# Altium PCB MEGA Shield.PcbDoc
Units mil, origin at the board's own origin, x right, y up, seen from the top; angles counter-clockwise.
Board outline 3365 x 2050 mil, 2 copper layers (Top Layer, Bottom Layer); 20 components, 44 nets, 167 pads, 3 vias.
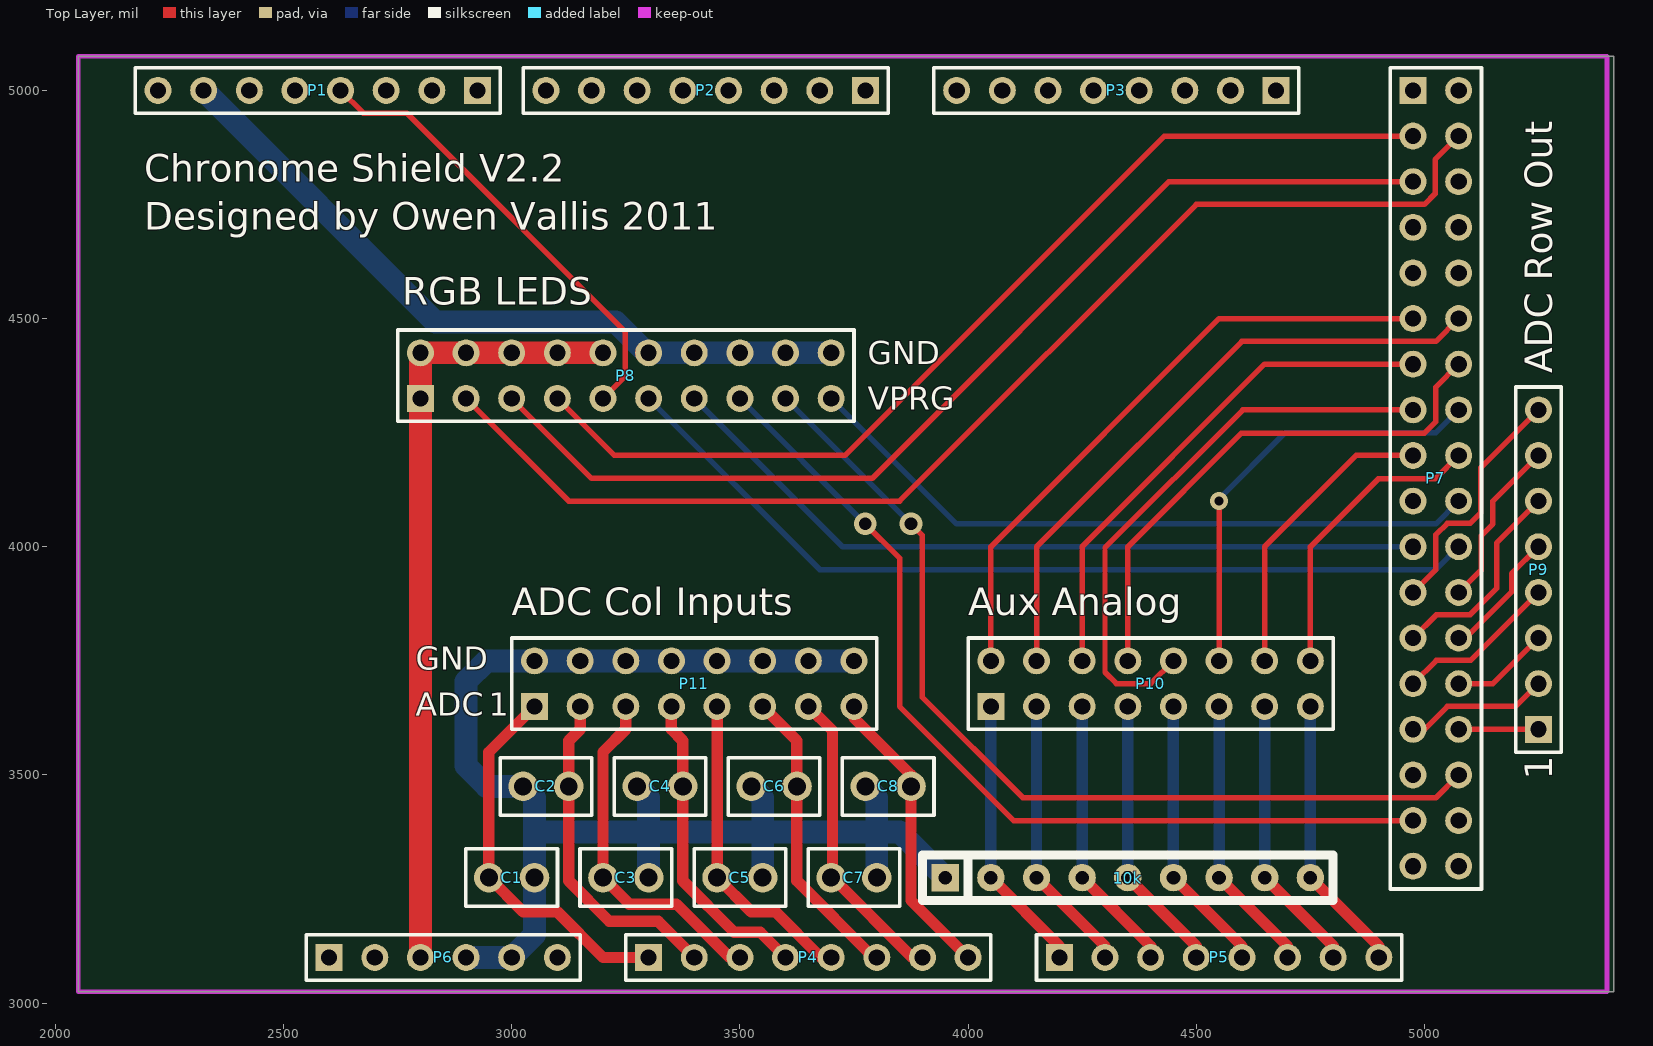
[diagram p0: Top Layer view]
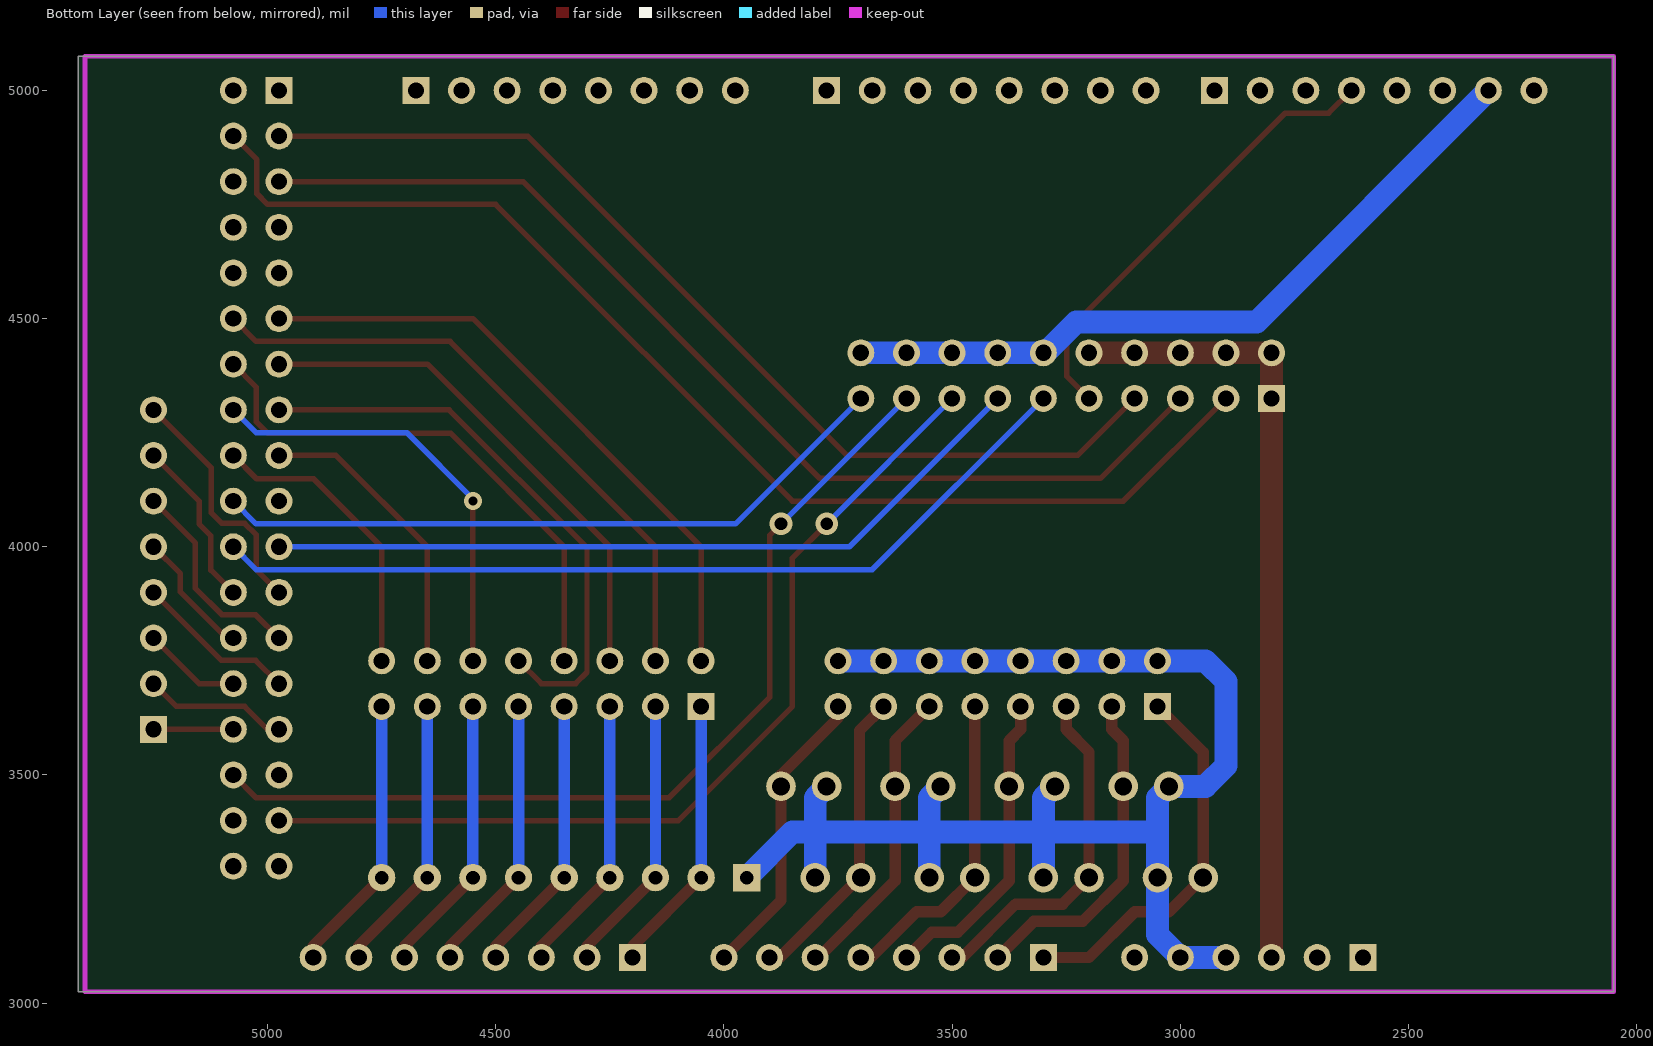
[diagram p1: Bottom Layer view, seen from below]

## Layer stack, top to bottom
Top Layer: signal copper 1.4
Dielectric: dielectric 12.6, FR-4, Dk 4.8
Bottom Layer: signal copper 1.4

## Board outline
2050,3025 2050,5075 5415,5075 5415,3025

## Design rules (kind name [scope] priority, off if disabled: settings)
Clearance [All] p1: gap=13
PolygonConnect [All] p1: connectstyle=Relief reliefconductorwidth=10 reliefentries=4 polygonreliefangle="90 Angle"
RoutingVias [All] p1: holewidth=20 width=40 viastyle="Through Hole" minholewidth=20 minwidth=40 maxholewidth=20 maxwidth=40
SilkscreenOverComponentPads [All] p1: minsilkscreentomaskgap=10
SolderMaskExpansion [All] p1: expansion=4
Width [All] p1: maxlimit=50 minlimit=12 preferedwidth=12 minimp=50.000000 maximp=50.000000 favimp=50.000000
27 further rules are at their usual default settings.

## Components (designator, comment, footprint, x,y, rotation, side; value= is the part's Value field where it differs from the comment)
10k "Res1" "9-Pin Resistor Network" 3950,3275 r90 top
C1 "Cap" CAPR2.54-5.1x3.2 3000,3275 r180 top
C2 "Cap" CAPR2.54-5.1x3.2 3075,3475 r0 top
C3 "Cap" CAPR2.54-5.1x3.2 3250,3275 r180 top
C4 "Cap" CAPR2.54-5.1x3.2 3325,3475 r0 top
C5 "Cap" CAPR2.54-5.1x3.2 3500,3275 r180 top
C6 "Cap" CAPR2.54-5.1x3.2 3575,3475 r0 top
C7 "Cap" CAPR2.54-5.1x3.2 3750,3275 r180 top
C8 "Cap" CAPR2.54-5.1x3.2 3825,3475 r0 top
P1 "PWM 8-13" HDR1X8 2925,5000 r180 top
P2 "PWM 2-7" HDR1X8 3775,5000 r180 top
P3 "COM" HDR1X8 4675,5000 r180 top
P4 "Analog In 0-7" HDR1X8 3300,3100 r0 top
P5 "Analog In 8-15" HDR1X8 4200,3100 r0 top
P6 "Power" HDR1X6 2600,3100 r0 top
P7 "Digital 22-53" HDR2X18 4975,5000 r270 top
P8 "OUT     IN" HDR2X10_CEN 2800,4325 r0 top
P9 "ADC Row Outputs" HDR1X8 5250,3600 r90 top
P10 "Extra ADC" HDR2X8_CEN 4050,3650 r0 top
P11 "ADC Col Inputs" HDR2X8_CEN 3050,3650 r0 top

## Footprints (in the part's own frame and the unit in brackets; to place one, negate y for a bottom-side part, rotate by r counter-clockwise, add the part's x,y. Pads: shape width x height; smd on the part's side, far side on the other; paste and mask are expansions set on the pad)
"9-Pin Resistor Network" [mil] "9-Pin Resistor Network"
  rect 60x60 hole 30: 0(0,0)
  round 60 hole 30: 1(0,-100) 2(0,-200) 3(0,-300) 4(0,-400) 5(0,-500) 6(0,-600) 7(0,-700) 8(0,-800)
  silkscreen extent -50,-850 50,50
CAPR2.54-5.1x3.2 [mm] "Capacitor, Ceramic, Thru-Hole, Dipped Radial; Body 5.1 x 3.2 mm (WxT) Pin Spacing 2.54 mm (typ)"
  round 1.65 hole 1: 1(-1.27,0) 2(1.27,0)
  silkscreen extent -2.55,-1.6 2.55,1.6
HDR1X6 [mm] "Connector; Header; 6 Position"
  rect 1.5x1.5 hole 0.9: 1(0,0)
  round 1.5 hole 0.9: 2(2.54,0) 3(5.08,0) 4(7.62,0) 5(10.16,0) 6(12.7,0)
  silkscreen extent -1.27,-1.27 13.97,1.27
HDR1X8 [mm] "Connector; Header; 8 Position"
  rect 1.5x1.5 hole 0.9: 1(0,0)
  round 1.5 hole 0.9: 2(2.54,0) 3(5.08,0) 4(7.62,0) 5(10.16,0) 6(12.7,0) 7(15.24,0) 8(17.78,0)
  silkscreen extent -1.27,-1.27 19.05,1.27
HDR2X8_CEN [mm] "Connector; Header; 8x2 Position"
  rect 1.5x1.5 hole 0.9: 1(0,0)
  round 1.5 hole 0.9: 2(2.54,0) 3(5.08,0) 4(7.62,0) 5(10.16,0) 6(12.7,0) 7(15.24,0) 8(17.78,0) 9(0,2.54) 10(2.54,2.54) 11(5.08,2.54) 12(7.62,2.54) 13(10.16,2.54) 14(12.7,2.54) 15(15.24,2.54) 16(17.78,2.54)
  silkscreen extent -1.27,-1.27 19.05,3.81
HDR2X10_CEN [mm] "Connector; Header; 10x2 Position"
  rect 1.5x1.5 hole 0.9: 1(0,0)
  round 1.5 hole 0.9: 2(2.54,0) 3(5.08,0) 4(7.62,0) 5(10.16,0) 6(12.7,0) 7(15.24,0) 8(17.78,0) 9(20.32,0) 10(22.86,0) 11(0,2.54) 12(2.54,2.54) 13(5.08,2.54) 14(7.62,2.54) 15(10.16,2.54) 16(12.7,2.54) 17(15.24,2.54) 18(17.78,2.54) 19(20.32,2.54) 20(22.86,2.54)
  silkscreen extent -1.27,-1.27 24.13,3.81
HDR2X18 [mm] "Connector; Header; 18x2 Position"
  rect 1.5x1.5 hole 0.9: 1(0,0)
  round 1.5 hole 0.9: 2(0,2.54) 3(2.54,0) 4(2.54,2.54) 5(5.08,0) 6(5.08,2.54) 7(7.62,0) 8(7.62,2.54) 9(10.16,0) 10(10.16,2.54) 11(12.7,0) 12(12.7,2.54) 13(15.24,0) 14(15.24,2.54) 15(17.78,0) 16(17.78,2.54) 17(20.32,0) 18(20.32,2.54) 19(22.86,0) 20(22.86,2.54) 21(25.4,0) 22(25.4,2.54) 23(27.94,0) 24(27.94,2.54) 25(30.48,0) 26(30.48,2.54) 27(33.02,0) 28(33.02,2.54) 29(35.56,0) 30(35.56,2.54) 31(38.1,0) 32(38.1,2.54) 33(40.64,0) 34(40.64,2.54) 35(43.18,0) 36(43.18,2.54)
  silkscreen extent -1.27,-1.27 44.45,3.81

## Part data
C1 C2 C3 C4 C5 C6 C7 C8: "Capacitor"
P1 P2 P3 P4 P5 P9: library part "Header 8", "Header, 8-Pin"
P6: library part "Header 6", "Header, 6-Pin"
P7: library part "Header 18X2", "Header, 18-Pin, Dual row"
P8: library part "Header 10X2A", "Header, 10-Pin, Dual row"
P10 P11: library part "Header 8X2A", "Header, 8-Pin, Dual row"

## Via types
v1: diameter 50, hole 28, Top Layer to Bottom Layer, 2 vias
v2: diameter 40, hole 20, Top Layer to Bottom Layer, 1 vias

## Nets (pads, with @x,y where several pads share a name; then routed paths per layer and width w, separated by ;. In a path a pad name is that pad's centre, name@x,y a point inside that pad or via, vN(x,y) a via of type N, cw(c..) or ccw(c..) an arc to the next point about the centre after c; other vN are vias at no path point)
ADCI1: 10k.8 P5.8 P10.8 | length 587.1
  Top Layer w25: 10k.8 P5.8@4900,3125
  Bottom Layer w25: 10k.8 P10.8
ADCI2: 10k.7 P5.7 P10.7 | length 587.1
  Top Layer w25: 10k.7 P5.7@4800,3125
  Bottom Layer w25: 10k.7 P10.7
ADCI3: 10k.6 P5.6 P10.6 | length 587.1
  Top Layer w25: 10k.6 P5.6@4700,3125
  Bottom Layer w25: 10k.6 P10.6
ADCI4: 10k.5 P5.5 P10.5 | length 587.1
  Top Layer w25: 10k.5 P5.5@4600,3125
  Bottom Layer w25: 10k.5 P10.5
ADCI5: 10k.4 P5.4 P10.4 | length 587.1
  Top Layer w25: 10k.4 P5.4@4500,3125
  Bottom Layer w25: 10k.4 P10.4
ADCI6: 10k.3 P5.3 P10.3 | length 612.1
  Top Layer w25: 10k.3 4400,3125 P5.3
  Bottom Layer w25: 10k.3 P10.3
ADCI7: 10k.2 P5.2 P10.2 | length 612.1
  Top Layer w25: 10k.2 4300,3125 P5.2
  Bottom Layer w25: 10k.2 P10.2
ADCI8: 10k.1 P5.1 P10.1 | length 587.1
  Top Layer w25: 10k.1 P5.1@4200,3125
  Bottom Layer w25: 10k.1 P10.1
ADCO1: P7.18 P10.16 | length 657.8
  Top Layer w12: P10.16 4750,4000 4899,4149 5024,4149 P7.18
ADCO2: P7.17 P10.15 | length 657.8
  Top Layer w12: P10.15 4650,4000 4850,4200 P7.17
ADCO3: P7.16 P10.14 | length 964.3
  Top Layer w12: P10.14@4550,3755 v2(4550,4100)
  Bottom Layer w12: v2@4547.5,4102.5 4695,4250 5025,4250 P7.16 ; v2@4550,4090 v2(4550,4100)
ADCO4: P7.15 P10.13 | length 1254.2
  Top Layer w12: P10.13 4400,3700 4325,3700 4300,3725 4300,3998 4602,4300 P7.15
ADCO5: P7.14 P10.12 | length 1185.2
  Top Layer w12: P10.12 4350,4000 4599,4249 5000,4249 5025,4274 5025,4350 P7.14
ADCO6: P7.13 P10.11 | length 1140.7
  Top Layer w12: P10.11 4250,4000 4650,4400 P7.13
ADCO7: P7.12 P10.10 | length 1382.1
  Top Layer w12: P10.10 4150,4000 4600,4450 5025,4450 P7.12
ADCO8: P7.11 P10.9 | length 1382.1
  Top Layer w12: P10.9 4050,4000 4550,4500 P7.11
BLANK: P7.22 P8.6 | length 1951
  Bottom Layer w12: P8.6 3675,3950 5025,3950 P7.22
BLUE: P7.5 P8.3 | length 2316.7
  Top Layer w12: P8.3 3175,4150 3790,4150 4440,4800 P7.5
COL1: C1.2 P4.1 P11.1 | length 863.9
  Top Layer w12: P4.1@3275,3100 P4.1
  Top Layer w25: P11.1 2950,3550 C1.2 3025,3200 3100,3200 3200,3100 P4.1
COL2: C2.2 P4.2 P11.2 | length 736.9
  Top Layer w25: P11.2 3150,3600 3125,3575 3125,3268 3213.98,3179.02 3320.98,3179.02 P4.2
COL3: C3.2 P4.3 P11.3 | length 746
  Top Layer w25: P11.3 3250,3600 3200,3550 C3.2 3257.98,3217.02 3360.8,3217.02 P4.3@3477.82,3100
COL4: C4.2 P4.4 P11.4 | length 686.9
  Top Layer w25: P11.4 3350,3600 3375,3575 3375,3268 3487.98,3155.03 3544.97,3155.03 P4.4
COL5: C5.2 P4.5 P11.5 | length 675.3
  Top Layer w25: P11.5 C5.2 3525,3200 3577.82,3200 P4.5@3677.82,3100
COL6: C6.2 P4.6 P11.6 | length 650.7
  Top Layer w25: P11.6 3625,3575 C6.2 3625,3268 P4.6@3793,3100
COL7: C7.2 P4.7 P11.7 | length 644.4
  Top Layer w25: P11.7 3702.82,3597.18 3702.82,3445.82 3702.82,3275 P4.7@3877.82,3100
COL8: C8.2 P4.8 P11.8 | length 628.6
  Top Layer w25: P11.8@3750,3625 3875,3500 3875,3225 P4.8
GND: P1.7 P8.16 P8.17 P8.18 P8.19 P8.20 | length 1613.2
  Top Layer w50: P8.16@3295.5,4425 P8.16
  Bottom Layer w50: P1.7 2832.47,4492.53 3227.97,4492.53 P8.16@3295.5,4425 ; P8.16 P8.17 P8.18 P8.19 P8.20
GNDADC: 10k.0 C1.1 C2.1 C3.1 C4.1 C5.1 C6.1 C7.1 C8.1 P6.4 P6.5 P11.9 P11.10 P11.11 P11.12 P11.13 P11.14 P11.15 P11.16 | length 3275.8
  Bottom Layer w12: P6.4 P6.4@2910,3100
  Bottom Layer w50: P6.4@2910,3100 P6.5 3050,3150 C1.1 3050,3375 ; C4.1 3300,3450 3300,3375 ; C3.1 3300,3375 ; C6.1 3550,3450 3550,3375 ; C5.1 3550,3375 ; P11.16 P11.15 P11.14 P11.13 P11.12 P11.11 P11.10 P11.9 2945,3750 2900,3705 2900,3520 2945,3475 C2.1 3050,3450 3050,3375 ; C8.1 3800,3450 3800,3375 ; C7.1 3800,3375 ; 10k.0 3850,3375 3800,3375 ; 3050,3375 3300,3375 ; 3300,3375 3550,3375 ; 3550,3375 3800,3375
GREEN: P7.3 P8.4 | length 2216.7
  Top Layer w12: P8.4 3225,4200 3730,4200 4430,4900 P7.3
GSCLK: P1.4 P8.5 | length 1009
  Top Layer w12: P1.4 2675,4950 2770,4950 3248.53,4471.47 3248.53,4373.53 P8.5
RED: P7.4 P8.2 | length 2643.5
  Top Layer w12: P8.2 3125,4100 3850,4100 4500,4750 5000,4750 5023.53,4773.53 5023.53,4848.53 P7.4
ROW1: P7.30 P9.1 | length 175
  Top Layer w12: P7.30 P9.1
ROW2: P7.29 P9.2 | length 393.4
  Top Layer w12: P7.29 5000,3600 5050,3650 ; 5127,3650 5050,3650 ; P9.2 5200,3650 5050,3650
ROW3: P7.28 P9.3 | length 216.4
  Top Layer w12: P7.28 5150,3700 P9.3
ROW4: P7.27 P9.4 | length 357.8
  Top Layer w12: P7.27 5026,3751 5101,3751 P9.4
ROW5: P7.26 P9.5 | length 281.3
  Top Layer w12: P7.26 5090,3800 5191,3901 5191,3941 P9.5
ROW6: P7.25 P9.6 | length 457.3
  Top Layer w12: P7.25 5026,3851 5100,3851 5158,3909 5158,4008 P9.6
ROW7: P7.24 P9.7 | length 372.5
  Top Layer w12: P7.24 5124,3949 5124,4024 5150,4050 5150,4100 P9.7
ROW8: P7.23 P9.8 | length 543.2
  Top Layer w12: P7.23 5025,3950 5025,4026.47 5050,4051.47 5100,4051.47 5123.53,4075 5123.53,4173.53 P9.8
SCLK: P7.33 P8.8 | length 2048.5
  Top Layer w12: v1(3774.67,4050.33) 3850,3975 3850,3650 4100,3400 P7.33
  Bottom Layer w12: P8.8 v1(3774.67,4050.33)
SIN: P7.32 P8.9 | length 2066.1
  Top Layer w12: v1(3874.7,4050.3) 3900,4025 3900,3670 4120,3450 5025,3450 P7.32
  Bottom Layer w12: P8.9 v1(3874.7,4050.3)
VCC: P6.3 P8.1 P8.11 P8.12 P8.13 P8.14 P8.15 | length 1725
  Top Layer w50: P6.3 P8.1 P8.11 P8.12 P8.13 P8.14 P8.15
VPRG: P7.20 P8.10 | length 1529.6
  Bottom Layer w12: P8.10@3690,4320 P8.10@3710,4320 ; P8.10 3975,4050 5025,4050 P7.20
XLAT: P7.21 P8.7 | length 1709.6
  Bottom Layer w12: P8.7 3725,4000 P7.21
pads on no net: P1.1 P1.2 P1.3 P1.5 P1.6 P1.8 P2.1 P2.2 P2.3 P2.4 P2.5 P2.6 P2.7 P2.8 P3.1 P3.2 P3.3 P3.4 P3.5 P3.6 P3.7 P3.8 P6.1 P6.2 P6.6 P7.1 P7.2 P7.6 P7.7 P7.8 P7.9 P7.10 P7.19 P7.31 P7.34 P7.35 P7.36

## Keep-outs
Keep-Out Layer:
  lines w10: 2050,3025 2050,5075 5400,5075 5400,3025 2050,3025

## Silkscreen, mask and mechanical layers (free items; w line width, h text height)
Top Overlay:
  text "Chronome Shield V2.2" at 2195,4800 h60
  text "Designed by Owen Vallis 2011" at 2195,4695 h60
  text "RGB LEDS" at 2760,4530 h60
  text "GND" at 3780,4400 h50
  text "ADC Row Out" at 5280,4380 h60 r90
  text "ADC Col Inputs" at 3000,3850 h60
  text "Aux Analog" at 4000,3850 h60
  text "GND" at 2790,3730 h50
  text "ADC" at 2790,3630 h50
  text "1" at 5280,3490 h60 r90

## Text inside footprints (layer, text, board x,y; h text height)
P8: Top Overlay "VPRG" at 3780,4300 h50
P11: Top Overlay "1" at 2950,3630 h50